# Altium PCB Tigershark 3D R1.3.PcbDoc (part 2 of 3)
Units mil, origin at the board's own origin, x right, y up, seen from the top; angles counter-clockwise.
Board outline 5500 x 4400 mil, 4 copper layers (Top Layer, Groun Plane, Power Plane, Bottom Layer); 256 components, 241 nets, 971 pads, 851 vias.
Unrouted connection lines stored in the file: 58.
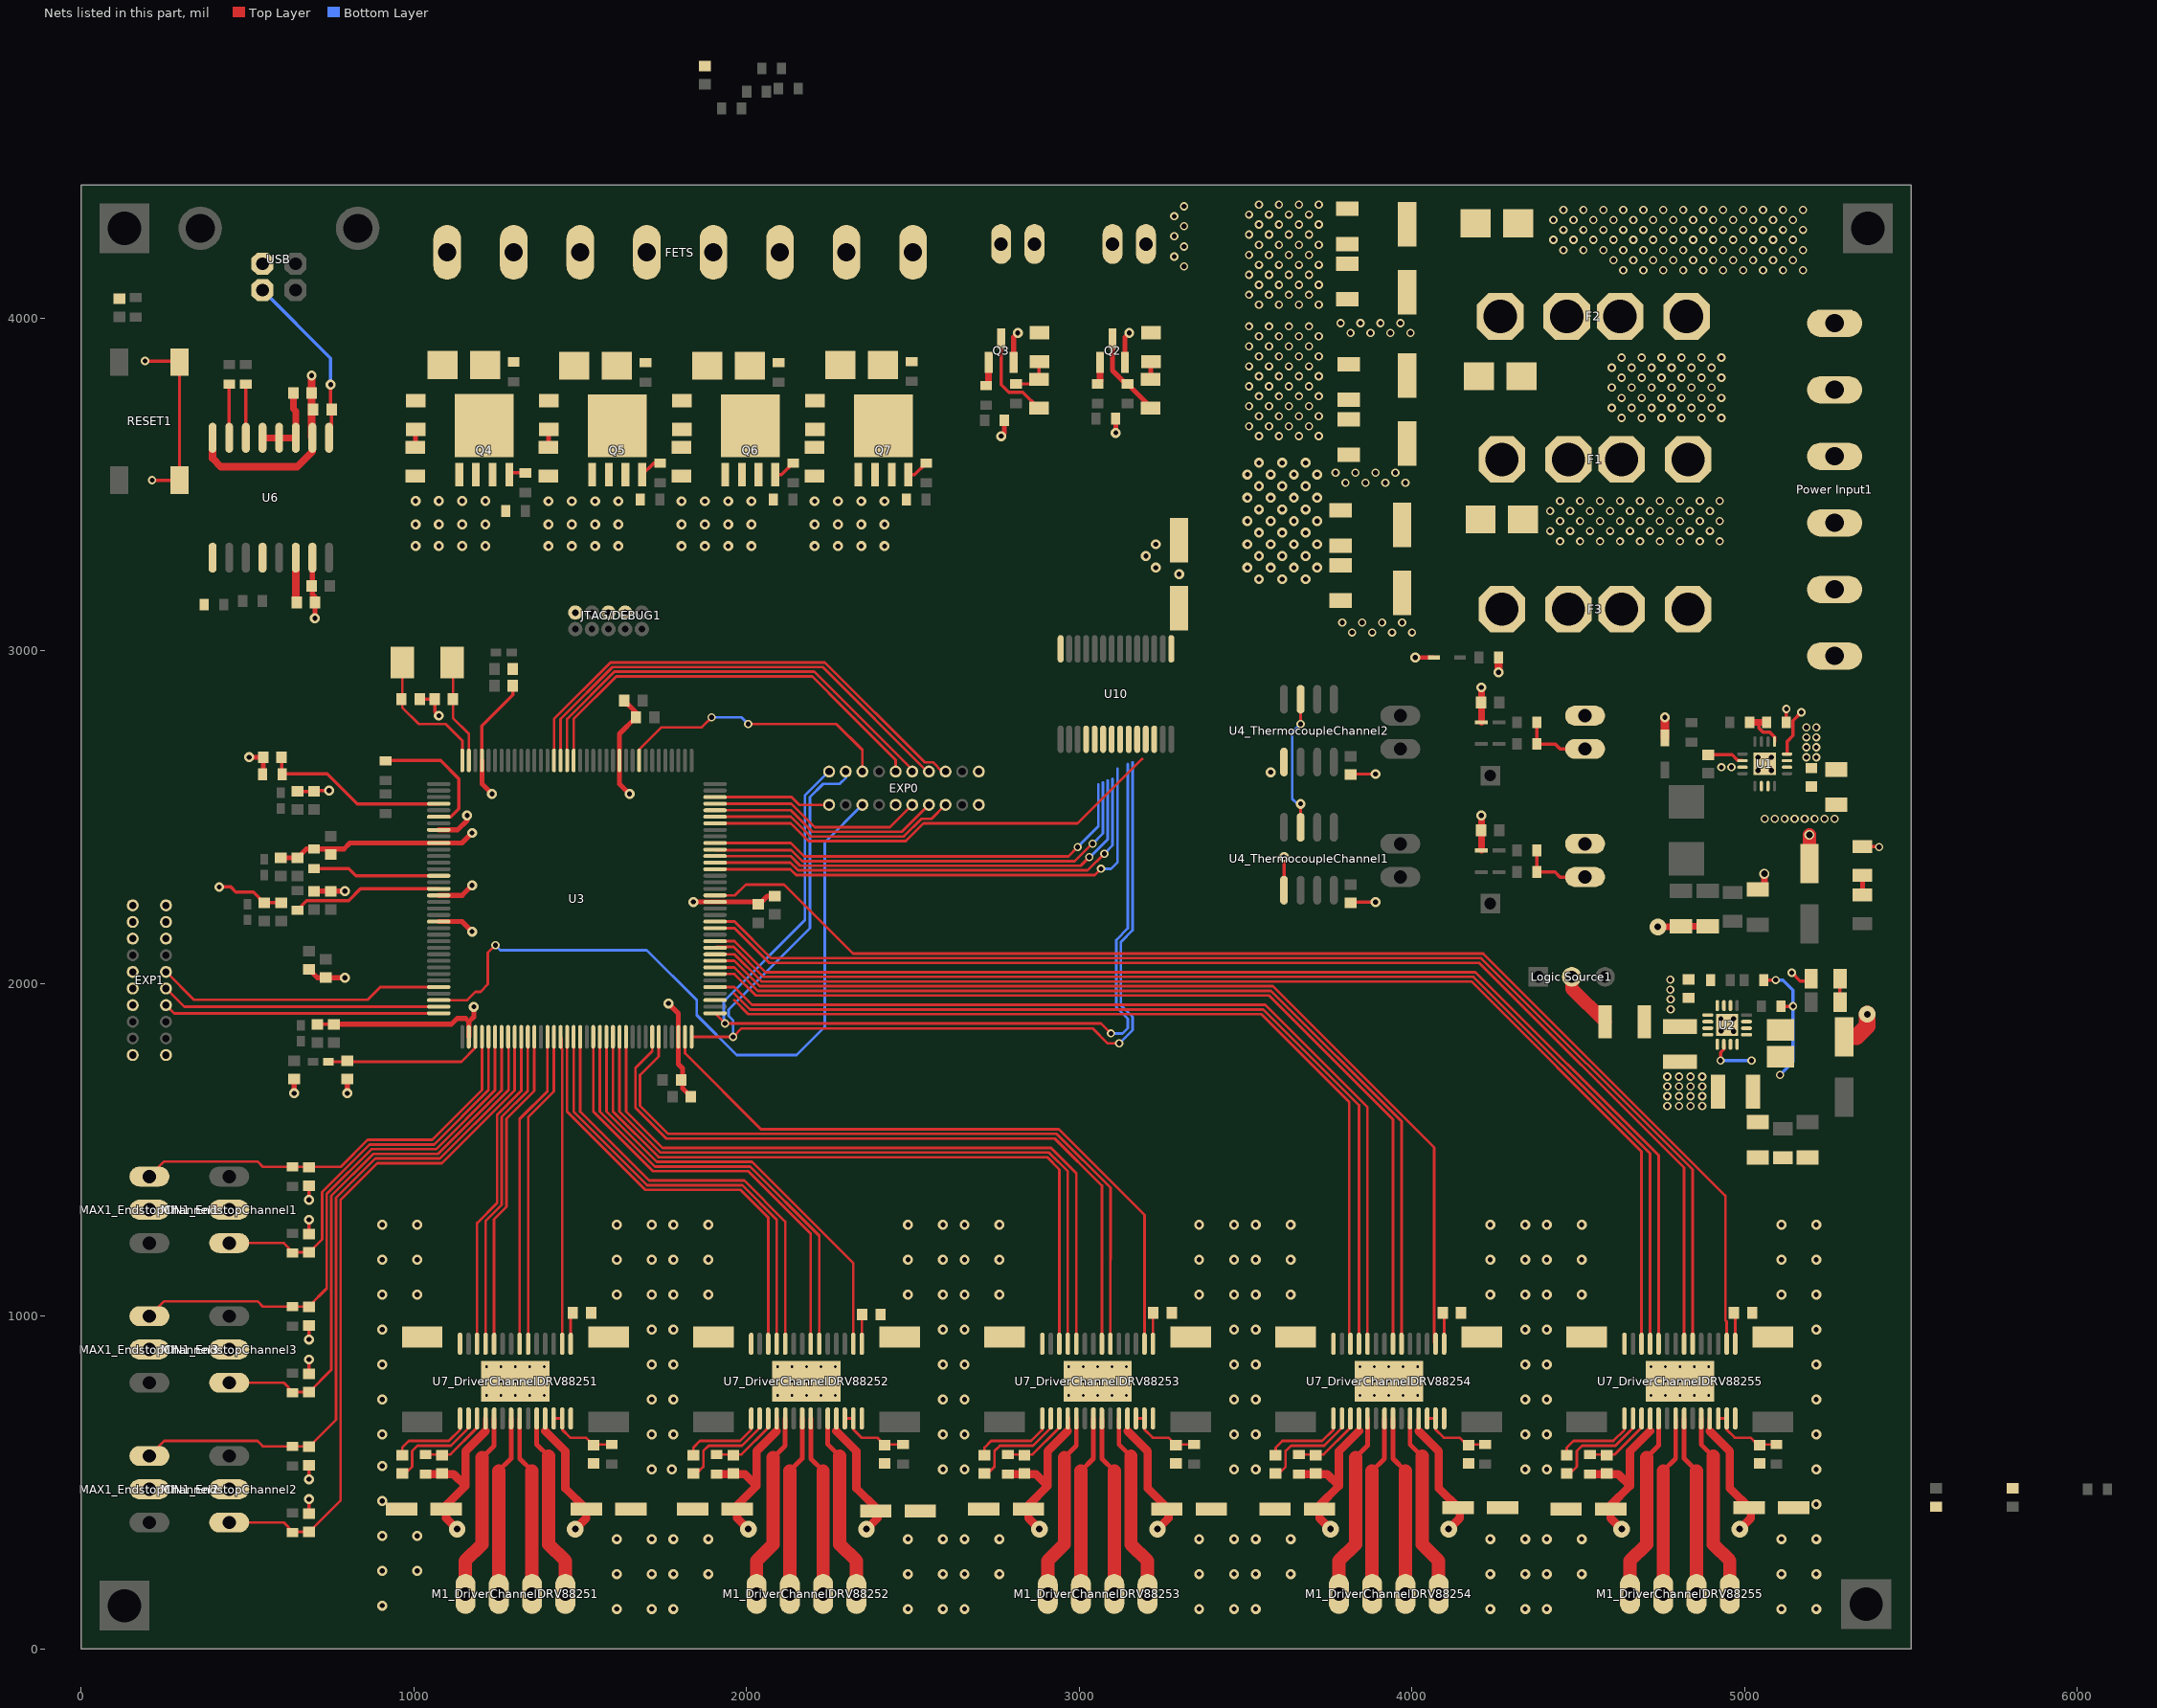
[diagram p4: the nets of this part, all layers, seen from the top]

## Via types
v1: diameter 25, hole 15, Top Layer to Bottom Layer, 397 vias
v2: diameter 30, hole 15, Top Layer to Bottom Layer, 361 vias
v3: diameter 19.68, hole 7.87, Top Layer to Bottom Layer, 75 vias
v4: diameter 50, hole 20, Top Layer to Bottom Layer, 15 vias
v5: diameter 30, hole 20, Top Layer to Bottom Layer, 3 vias

## Nets (pads, with @x,y where several pads share a name; then routed paths per layer and width w, separated by ;. In a path a pad name is that pad's centre, name@x,y a point inside that pad or via, vN(x,y) a via of type N, cw(c..) or ccw(c..) an arc to the next point about the centre after c; other vN are vias at no path point) (continued)
+12VCC1: C10.2 C11.2 C16.1 C18.2 C19.2 C66_DriverChannelDRV88251.1 C66_DriverChannelDRV88252.1 C66_DriverChannelDRV88253.1 C66_DriverChannelDRV88254.1 C66_DriverChannelDRV88255.1 C69_DriverChannelDRV88251.1 C69_DriverChannelDRV88252.1 C69_DriverChannelDRV88253.1 C69_DriverChannelDRV88254.1 C69_DriverChannelDRV88255.1 C70_DriverChannelDRV88251.1 C70_DriverChannelDRV88252.1 C70_DriverChannelDRV88253.1 C70_DriverChannelDRV88254.1 C70_DriverChannelDRV88255.1 D8.2 F3.2 R30_DriverChannelDRV88251.1 R30_DriverChannelDRV88252.1 R30_DriverChannelDRV88253.1 R30_DriverChannelDRV88254.1 R30_DriverChannelDRV88255.1 U1.2 U1.3 U1.11 U7_DriverChannelDRV88251.4 U7_DriverChannelDRV88251.11 U7_DriverChannelDRV88252.4 U7_DriverChannelDRV88252.11 U7_DriverChannelDRV88253.4 U7_DriverChannelDRV88253.11 U7_DriverChannelDRV88254.4 U7_DriverChannelDRV88254.11 U7_DriverChannelDRV88255.4 U7_DriverChannelDRV88255.11 | length 4639.6
  Top Layer w14: 1215.43,654.43 U7_DriverChannelDRV88251.4@1215.43,692.8 ; 1394.57,654.43 U7_DriverChannelDRV88251.11@1394.57,692.8 ; 2090.43,654.43 U7_DriverChannelDRV88252.4@2090.43,692.8 ; 2269.57,654.43 U7_DriverChannelDRV88252.11@2269.57,692.8 ; 2965.43,654.43 U7_DriverChannelDRV88253.4@2965.43,692.8 ; 3144.57,654.43 U7_DriverChannelDRV88253.11@3144.57,692.8 ; 3840.43,654.43 U7_DriverChannelDRV88254.4@3840.43,692.8 ; 4019.57,654.43 U7_DriverChannelDRV88254.11@4019.57,692.8 ; 4715.43,654.43 U7_DriverChannelDRV88255.4@4715.43,692.8 ; 4894.57,654.43 U7_DriverChannelDRV88255.11@4894.57,692.8
  Top Layer w25: R30_DriverChannelDRV88251.1@1035,525.47 1119.53,525.47 1155,490 ; v4(1130,360) 1096.93,393.07 C70_DriverChannelDRV88251.1@1096.93,420 1096.93,431.93 1155,490 ; 1215.43,654.43 1155,594 1155,490 ; 1394.57,654.43 1455,594 1455,483.07 C69_DriverChannelDRV88251.1@1518.07,420 1518.07,393.07 v4(1485,360) ; R30_DriverChannelDRV88252.1@1910,525.47 1994.53,525.47 2030,490 ; v4(2005,360) 1971.93,393.07 C69_DriverChannelDRV88252.1@1971.93,420 1971.93,431.93 2030,490 ; 2090.43,654.43 2030,594 2030,490 ; 2269.57,654.43 2330,594 2330,483.07 2393.07,420 2393.07,393.07 v4(2360,360) ; R30_DriverChannelDRV88253.1@2785,525.47 2869.53,525.47 2905,490 ; v4(2880,360) 2846.93,393.07 C69_DriverChannelDRV88253.1@2846.93,420 2846.93,431.93 2905,490 ; 2965.43,654.43 2905,594 2905,490 ; 3144.57,654.43 3205,594 3205,483.07 3268.07,420 3268.07,393.07 v4(3235,360) ; R30_DriverChannelDRV88254.1@3660,525.47 3744.53,525.47 3780,490 ; v4(3755,360) 3721.93,393.07 C69_DriverChannelDRV88254.1@3721.93,420 3721.93,431.93 3780,490 ; 3840.43,654.43 3780,594 3780,490 ; 4019.57,654.43 4080,594 4080,483.07 4143.07,420 4143.07,393.07 v4(4110,360) ; R30_DriverChannelDRV88255.1@4535,525.47 4619.53,525.47 4655,490 ; v4(4630,360) 4596.93,393.07 C69_DriverChannelDRV88255.1@4596.93,420 4596.93,431.93 4655,490 ; 4715.43,654.43 4655,594 4655,490 ; 4894.57,654.43 4955,594 4955,483.07 5018.07,420 5018.07,393.07 v4(4985,360)
  other v1: 4930,2650 4960,2650.16 5185,2680 5215,2680 5185,2710 5215,2710 5185,2740 5215,2740 5185,2770 5215,2770
  other v2: 3540,3215 3610,3215 3680,3215 3505,3250 3575,3250 3645,3250 3715,3250 3540,3285 3610,3285 3680,3285 3505,3320 3575,3320 3645,3320 3715,3320 3540,3355 3610,3355 3680,3355 3505,3390 3575,3390 3645,3390 3715,3390 3540,3425 3610,3425 3680,3425 3505,3460 3575,3460 3645,3460 3715,3460 3540,3495 3610,3495 3680,3495 3505,3530 3575,3530 3645,3530 3715,3530 3540,3565 3610,3565 3680,3565
+12VCC2: C3.1 C5.2 C6.2 C17.1 D4.2 D15.2 D17.2 D19.2 F2.2 FAN-1.1 FAN-2.1 FETS.3 FETS.5 FETS.7 R1.2 R13.1 R47.1 R60.2 R64.2 R68.2 U10.28 | length 45.2
  Top Layer w8: R1.2@4259.53,2980 R1.2@4260,2979.53
  Top Layer w25: v2(4260,2935) R1.2@4260,2979.53
  other v1: 3540,4040 3600,4040 3660,4040 3720,4040 3510,4070 3570,4070 3630,4070 3690,4070 3540,4100 3600,4100 3660,4100 3720,4100 3510,4130 3570,4130 3630,4130 3690,4130 3315,4155 3540,4160 3600,4160 3660,4160 3720,4160 3285,4185 3510,4190 3570,4190 3630,4190 3690,4190 3315,4215 3540,4220 3600,4220 3660,4220 3720,4220 3285,4246 3510,4251 3570,4251 3630,4251 3690,4251 3315,4276 3540,4281 3600,4281 3660,4281 3720,4281 3285,4306 3510,4311 3570,4311 3630,4311 3690,4311 3315,4336 3540,4341 3600,4341 3660,4341 3720,4341
+12VCC3: C12.1 C14.2 C15.2 D6.2 D12.2 F1.2 FETS.1 R56.2
  other v1: 3540,3645 3600,3645 3660,3645 3720,3645 3510,3675 3570,3675 3630,3675 3690,3675 3540,3705 3600,3705 3660,3705 3720,3705 3510,3735 3570,3735 3630,3735 3690,3735 3540,3765 3600,3765 3660,3765 3720,3765 3510,3795 3570,3795 3630,3795 3690,3795 3540,3825 3600,3825 3660,3825 3720,3825 3510,3855 3570,3855 3630,3855 3690,3855 3540,3885 3600,3885 3660,3885 3720,3885 3510,3915 3570,3915 3630,3915 3690,3915 3540,3945 3600,3945 3660,3945 3720,3945 3510,3975 3570,3975 3630,3975 3690,3975
AVREF: C65.2 FB9.2 U3.75 | length 491.1
  Top Layer w8: FB9.2@743.62,1765 1142.57,1765 1184.88,1807.31 U3.75@1184.88,1839.65
BED_PWM: U10.9
BST: C7.2 U1.10 | length 110.4
  Top Layer w10: C7.2@4890,2687.56 4961.7,2687.56 4979.41,2669.84 U1.10@4993.07,2669.84
CS_FET: U3.111 U10.10
DIR1: U3.87 U7_DriverChannelDRV88251.20 | length 954.6
  Top Layer w8: U7_DriverChannelDRV88251.20@1343.39,917.2 1343.39,1598.39 1421,1676 1421,1839.54 U3.87@1421.1,1839.65
DIR2: U3.94 U7_DriverChannelDRV88252.20 | length 1363.3
  Top Layer w8: U3.94@1558.9,1839.65 1558.9,1615.1 1723.99,1450 2010.2,1450 2218.39,1241.82 U7_DriverChannelDRV88252.20@2218.39,917.2
DIR3: U3.103 U7_DriverChannelDRV88253.20 | length 2215.6
  Top Layer w8: U3.103@1736.06,1839.65 1736.06,1781.06 1680,1725 1680,1632.59 1764.59,1548 2932.2,1548 3094,1386.2 3094,1169.01 3093.39,1168.4 U7_DriverChannelDRV88253.20@3093.39,917.2
DIR4: U3.116 U7_DriverChannelDRV88254.20 | length 2923.1
  Top Layer w8: U3.116@1905.35,2048.31 1963.1,2048.31 2033.41,1978 3575.99,1978 3968.39,1585.61 U7_DriverChannelDRV88254.20@3968.39,917.2
DIR5: U3.123 U7_DriverChannelDRV88255.20 | length 3770.2
  Top Layer w8: U3.123@1905.35,2186.1 1963.9,2186.1 2074,2076 4207.99,2076 4843.39,1440.61 U7_DriverChannelDRV88255.20@4843.39,917.2
DIR_EXP1: EXP1.6
DIR_EXP2: EXP1.15 U3.71 | length 842.3
  Top Layer w8: EXP1.15@255,1985 309.8,1930.2 U3.71@1074.65,1930.2
DM_N: R18.1 U6.6 | length 161.4
  Top Layer w10: U6.6@495,3640.12 R18.1@495,3801.47
DP_P: R20.1 U6.7 | length 161.4
  Top Layer w10: U6.7@445,3640.12 R20.1@445,3801.47
DRV_RESET1: U3.88 U7_DriverChannelDRV88251.16 | length 924.5
  Top Layer w8: U3.88@1440.79,1839.65 1444.57,1835.87 1444.57,1803.53 1445.75,1802.35 U7_DriverChannelDRV88251.16@1445.75,917.2
DRV_RESET2: U3.95 U7_DriverChannelDRV88252.16 | length 1397.5
  Top Layer w8: U3.95@1578.58,1839.65 1578.58,1615.21 1729.79,1464 2016,1464 2320.75,1159.25 U7_DriverChannelDRV88252.16@2320.75,917.2
DRV_RESET3: U3.107 U7_DriverChannelDRV88253.16 | length 2018.7
  Top Layer w8: U3.107@1814.8,1839.65 1814.8,1790.2 2043,1562 2938,1562 3195.75,1304.25 U7_DriverChannelDRV88253.16@3195.75,917.2
DRV_RESET4: U3.117 U7_DriverChannelDRV88254.16 | length 2985.2
  Top Layer w8: U3.117@1905.35,2067.99 1963.21,2067.99 2039.21,1992 3581.79,1992 4066.69,1507.1 4066.69,921.26 U7_DriverChannelDRV88254.16@4070.75,917.2
DRV_RESET5: U3.127 U7_DriverChannelDRV88255.16 | length 3883.7
  Top Layer w8: U3.127@1905.35,2264.84 1964.84,2264.84 1997.23,2297.23 2112.72,2297.23 2319.95,2090 4213.79,2090 4941.69,1362.1 4941.69,988.14 4945.75,984.09 U7_DriverChannelDRV88255.16@4945.75,917.2
DRV_RESET_EXP1: EXP1.7
DRV_RESET_EXP2: EXP1.14 U3.72 | length 829.8
  Top Layer w8: EXP1.14@255,1935 279.49,1910.51 U3.72@1074.65,1910.51
EN1: U3.86 U7_DriverChannelDRV88251.21 | length 957.1
  Top Layer w8: U7_DriverChannelDRV88251.21@1317.8,917.2 1317.8,1592.8 1401.42,1676.42 U3.86@1401.42,1839.65
EN2: U3.93 U7_DriverChannelDRV88252.21 | length 1360.8
  Top Layer w8: U3.93@1539.21,1839.65 1539.21,1614.98 1718.2,1436 2004.4,1436 2192.8,1247.61 U7_DriverChannelDRV88252.21@2192.8,917.2
EN3: U3.102 U7_DriverChannelDRV88253.21 | length 2207.9
  Top Layer w8: U3.102@1716.38,1839.65 1716.38,1796.38 1666,1746 1666,1626.79 1758.79,1534 2926.4,1534 3067.8,1392.61 U7_DriverChannelDRV88253.21@3067.8,917.2
EN4: U3.115 U7_DriverChannelDRV88254.21 | length 2892.7
  Top Layer w8: U3.115@1905.35,2028.62 1962.99,2028.62 2027.61,1964 3570.2,1964 3942.8,1591.4 U7_DriverChannelDRV88254.21@3942.8,917.2
EN5: U3.122 U7_DriverChannelDRV88255.21 | length 3739.9
  Top Layer w8: U3.122@1905.35,2166.42 1963.78,2166.42 2068.2,2062 4202.2,2062 4817.8,1446.4 U7_DriverChannelDRV88255.21@4817.8,917.2
EN_EXP1: EXP1.5
EN_EXP2: EXP1.16 U3.68 | length 870.3
  Top Layer w8: EXP1.16@255,2035 339,1951 860.8,1951 899.05,1989.25 U3.68@1074.65,1989.25
EXP_CS: EXP0.1 U3.142 | length 352.2
  Top Layer w8: U3.142@1905.35,2560.12 2134.88,2560.12 2158,2537 EXP0.1@2248,2537
EXP_INTERRUP1: EXP0.16 U3.19 | length 1284.4
  Top Layer w8: U3.19@1480.16,2670.35 1480.16,2794.76 1608.4,2923 2197.2,2923 2248,2872.2 2248,2872 2448,2672 EXP0.16@2448,2637
EXP_INTERRUP2: EXP0.15 U3.20 | length 1348.1
  Top Layer w8: U3.20@1460.47,2670.35 1460.47,2794.87 1602.6,2937 2203,2937 2498,2642 EXP0.15@2498,2637
EXP_SYNC: EXP0.6 U3.141 | length 649.6
  Top Layer w8: U3.141@1905.35,2540.43 2134.57,2540.43 2205,2470 2431,2470 EXP0.6@2498,2537
FB: R7.1 R10.2 U1.5 | length 134.9
  Top Layer w10: 5042.26,2785 5042.26,2767.74 5055,2755 5075.11,2755 5089.53,2740.59 U1.5@5089.53,2726.93
  Top Layer w20: R7.1@5019.53,2785 R10.2@5065,2785
FET_PWM1: U3.131 U10.4 | length 1513.1
  Top Layer w8: U3.131@1905.35,2343.58 2131.64,2343.58 2149.22,2326 3046,2326 v1(3065,2345)
  Bottom Layer w8: v1(3065,2345) 3095,2345 3115,2365 3115,2645
FET_PWM2: U3.132 U10.5 | length 1435.4
  Top Layer w8: U3.132@1905.35,2363.27 2033.27,2363.27 2033.31,2363.31 2131.71,2363.31 2155.02,2340 3025,2340 v1(3075,2390)
  Bottom Layer w8: v1(3075,2390) 3100,2415 3100,2615
FET_PWM3: U3.133 U10.6 | length 1401.3
  Top Layer w8: U3.133@1905.35,2382.95 2132.05,2382.95 2161,2354 3004,2354 v1(3030,2380)
  Bottom Layer w8: v1(3030,2380) 3031.82,2380 3085,2433.18 3085,2610
FET_PWM4: U3.134 U10.7 | length 1367.6
  Top Layer w8: U3.134@1905.35,2402.64 1906.99,2401 2134.2,2401 2167.2,2368 2986.18,2368 3038.18,2420 v1(3040,2420)
  Bottom Layer w8: v1(3040,2420) 3071,2451 3071,2604.2
FET_PWM5: U3.135 U10.8 | length 1332
  Top Layer w8: U3.135@1905.35,2422.32 2132.68,2422.32 2173,2382 2967,2382 v1(2995,2410)
  Bottom Layer w8: v1(2995,2410) 3057,2472 3057,2598.4
FET_RESET: U3.138 | length 1407.6
  Top Layer w8: U3.138@1905.35,2481.38 2133.02,2481.38 2186.4,2428 2478.6,2428 2531.6,2481 2994.58,2481 3188.58,2675
GND: "Power Input1.2" "Power Input1.4" "Power Input1.6" C1_EndstopChannel1.2 C1_EndstopChannel2.2 C1_EndstopChannel3.2 C2_EndstopChannel1.2 C2_EndstopChannel2.2 C2_EndstopChannel3.2 C3.2 C4.2 C5.1 C6.1 C8.1 C9.2 C10.1 C11.1 C12.2 C13.1 C14.1 C15.1 C16.2 C17.2 C18.1 C19.1 C22.2 C23.2 C24.1 C25.1 C26.2 C27.1 C28.1 C29.2 C30_ThermistorChannel1.1 C30_ThermistorChannel2.1 C31_ThermocoupleChannel1.1 C31_ThermocoupleChannel2.1 C32.1 C33.1 C34.2 C35.2 C36.1 C37.1 C38.1 C39.1 C40.1 C41.1 C42.1 C43.1 C44.1 C45.1 C46.1 C47.1 C48.1 C52.2 C53.1 C54.1 C55.1 C56.1 C57.1 C60.1 C61.1 C62.1 C63.1 C64.1 C65.1 C69_DriverChannelDRV88251.2 C69_DriverChannelDRV88252.2 C69_DriverChannelDRV88253.2 C69_DriverChannelDRV88254.2 C69_DriverChannelDRV88255.2 C70_DriverChannelDRV88251.2 C70_DriverChannelDRV88252.2 C70_DriverChannelDRV88253.2 C70_DriverChannelDRV88254.2 C70_DriverChannelDRV88255.2 C71_DriverChannelDRV88251.1 C71_DriverChannelDRV88252.1 C71_DriverChannelDRV88253.1 C71_DriverChannelDRV88254.1 C71_DriverChannelDRV88255.1 C73.1 C75_DriverChannelDRV88251.1 C75_DriverChannelDRV88252.1 C75_DriverChannelDRV88253.1 C75_DriverChannelDRV88254.1 C75_DriverChannelDRV88255.1 D1.1 D4.1 D5.1 D6.1 D7.1 D8.1 D9.1 D12_ThermistorChannel1.1 D12_ThermistorChannel2.1 EXP0.10 EXP0.11 EXP1.10 EXP1.11 JTAG/DEBUG1.3 JTAG/DEBUG1.5 JTAG/DEBUG1.9 MAX1_EndstopChannel1.2 MAX1_EndstopChannel2.2 MAX1_EndstopChannel3.2 MIN1_EndstopChannel1.2 MIN1_EndstopChannel2.2 MIN1_EndstopChannel3.2 P2_ThermistorChannel1.2 P2_ThermistorChannel2.2 Q2.2 Q3.2 Q4.1 Q4.2 Q4.3 Q5.1 Q5.2 Q5.3 Q6.1 Q6.2 Q6.3 Q7.1 Q7.2 Q7.3 R4.2 R10.1 R15.2 R23.1 R32_DriverChannelDRV88251.1 R32_DriverChannelDRV88252.1 R32_DriverChannelDRV88253.1 R32_DriverChannelDRV88254.1 R32_DriverChannelDRV88255.1 R33_DriverChannelDRV88251.1 R33_DriverChannelDRV88252.1 R33_DriverChannelDRV88253.1 R33_DriverChannelDRV88254.1 R33_DriverChannelDRV88255.1 R38.1 R46.2 R55.2 R59.2 R63.2 R67.2 R71.2 RESET1.2 U1.4 U1.14 U1.15 U1.17 U2.6 U2.7 U2.8 U2.15 U2.16 U2.17 U3.12 U3.33 U3.44 U3.46 U3.54 U3.58 U3.74 U3.106 U3.126 U4_ThermocoupleChannel1.1 U4_ThermocoupleChannel2.1 U6.9 U6.15 U7_DriverChannelDRV88251.14 U7_DriverChannelDRV88251.28 U7_DriverChannelDRV88251.29 U7_DriverChannelDRV88252.14 U7_DriverChannelDRV88252.28 U7_DriverChannelDRV88252.29 U7_DriverChannelDRV88253.14 U7_DriverChannelDRV88253.28 U7_DriverChannelDRV88253.29 U7_DriverChannelDRV88254.14 U7_DriverChannelDRV88254.28 U7_DriverChannelDRV88254.29 U7_DriverChannelDRV88255.14 U7_DriverChannelDRV88255.28 U7_DriverChannelDRV88255.29 U10.15 | length 6032.6
  Top Layer w10: v1(192,3871) 291.72,3871 RESET1.2@295.55,3867.17 RESET1.2@295.55,3512.83 v1(213.17,3512.83) ; v2(415,2290) 450,2290 465,2275 517.56,2275 C55.1@550,2242.56 C54.1@601.22,2242.56 ; C61.1@650,2577.56 C60.1@700,2577.56 702.44,2580 v2(745,2580) ; C1_EndstopChannel2.2@685,407.09 v2(685,450) ; v2(685,510) C2_EndstopChannel2.2@685,552.44 ; C1_EndstopChannel3.2@685,827.09 v2(685,870) ; v2(685,930) C2_EndstopChannel3.2@685,972.44 ; C1_EndstopChannel1.2@685,1247.09 v2(685,1290) ; v2(685,1350) C2_EndstopChannel1.2@685,1392.44 ; C27.1@710,1877.56 C13.1@760,1877.56 ; C43.1@1017.56,2855 C44.1@1062.44,2855 1062.44,2817.56 v2(1075,2805) ; U3.33@1204.57,2670.35 1204.57,2774.57 1297.56,2867.56 C33.1@1297.56,2895 ; U4_ThermocoupleChannel1.1@3615,2280.51 v2(3615,2380) ; C31_ThermocoupleChannel1.1@3832.56,2244.49 v2(3890,2244.49) ; C31_ThermocoupleChannel2.1@3832.56,2629.49 v2(3890,2629.49) ; R10.1@5125,2785.47 v1(5125,2825) ; U1.4@5126.93,2689.53 5126.93,2726.93 5145,2745 5145,2790 v1(5170,2815) ; v1(5141.45,2032.45) 5166.45,2007.45 5193.3,2007.45 D9.1@5199.79,2013.94 ; D7.1@5354,2411.62 v1@5402.38,2411.62
  Top Layer w12: v2(4009.53,2980) D1.1@4065.63,2980
  Top Layer w15: v2(505,2680) C73.1@547.44,2680 R23.1@547.44,2630.75 ; C28.1@600,2377.56 C53.1@650,2377.56 676.97,2404.53 R4.2@700,2404.53 789.53,2404.53 807.32,2422.32 U3.46@1074.65,2422.32 1144.84,2422.32 v2(1175,2452.48) ; v2(640,1670) C64.1@640,1712.44 ; C42.1@685,2042.44 710,2017.44 C48.1@735,2017.44 v2(792.56,2017.44) ; U6.15@695,3279.88 695,3170 702.56,3162.44 C56.1@702.56,3145 v2(702.56,3097.56) ; C37.1@700,2277.56 C36.1@750,2277.56 v2(792.44,2277.56) ; C13.1@760,1877.56 1112.56,1877.56 1130,1895 1155,1895 1165.2,1884.8 ; v2(800,1670) C65.1@800,1712.44 ; U3.58@1074.65,2186.1 1144.84,2186.1 v2(1175,2155.94) ; U3.54@1074.65,2264.84 1144.84,2264.84 v2(1175,2295) ; U3.44@1074.65,2461.69 1131.69,2461.69 1160,2490 v2(1160,2505) ; U3.74@1165.2,1839.65 1165.2,1884.8 ; v2(1180,1930) 1180,1899.61 1165.2,1884.8 ; U3.33@1204.57,2670.35 1204.57,2600.16 v2(1234.72,2570) ; C47.1@1632.44,2850 1667.44,2815 C38.1@1667.44,2800 1617.95,2750.51 U3.12@1617.95,2670.35 1617.95,2600.16 v2(1648.11,2570) ; v2(1764.96,1940) 1795.12,1909.84 U3.106@1795.12,1839.65 1795.12,1757.95 1808.07,1745 1808.07,1684.92 C45.1@1832.99,1660 ; v2@1835.16,2245.16 U3.126@1905.35,2245.16 2045.16,2245.16 2062.56,2262.56 C46.1@2085,2262.56 ; v2(2765,3645) 2774.53,3654.53 R55.2@2774.53,3692.58 ; Q3.2@2802.4,3867.14 2802.4,3942.4 v2(2815,3955) ; v2(3109.53,3655) R46.2@3109.53,3697.58 ; Q2.2@3137.4,3867.14 3137.4,3942.4 v2(3150,3955)
  Top Layer w20: D12_ThermistorChannel1.1@4208.43,2400 v2(4208.43,2505) ; D12_ThermistorChannel2.1@4208.43,2785 v2(4208.43,2890) ; v4(4739,2170) C8.1@4806.15,2170 ; C8.1@4808,2171.85 C29.2@4889,2171.85 ; C34.2@5059,2283.15 v5(5059,2330)
  Top Layer w25: D5.1@4760,2738.23 v2(4760,2800)
  Top Layer w40: C9.2@5194,2400 v5(5194,2446.85)
  Top Layer w50: C23.2@5299,1840 5335.82,1840 5368.27,1872.45 v4(5368.27,1907.45)
  other v1: 4767.18,1631.45 4802.18,1631.45 4837.18,1631.45 4872.18,1631.45 4767.18,1661.45 4802.18,1661.45 4837.18,1661.45 4872.18,1661.45 4767.18,1690.45 4802.18,1690.45 4837.18,1690.45 4872.18,1690.45 4767.18,1720.45 4802.18,1720.45 4837.18,1720.45 4872.18,1720.45 4966.18,1856.45 4929.18,1857.45 4928.18,1894.45 4966.18,1894.45 4777.18,1922.45 4777.18,1952.45 4776.18,1981.45 4776.18,2011.45 5403.99,2410 5060,2495 5090,2495 5120,2495 5150,2495 5180,2495 5210,2495 5240,2495 5270,2495 5040,2640 5080,2640 5040,2680 5080,2680 3820,3055 3880,3055 3940,3055 4000,3055 3790,3085 3850,3085 3910,3085 3970,3085 4445,3329 4505,3329 4565,3329 4625,3329 4685,3329 4745,3329 4805,3329 4865,3329 4925,3329 4415,3360 4475,3360 4535,3360 4595,3360 4655,3360 4715,3360 4775,3360 4835,3360 4895,3360 4445,3390 4505,3390 4565,3390 4625,3390 4685,3390 4745,3390 4805,3390 4865,3390 4925,3390 4415,3420 4475,3420 4535,3420 4595,3420 4655,3420 4715,3420 4775,3420 4835,3420 4895,3420 4445,3450 4505,3450 4565,3450 4625,3450 4685,3450 4745,3450 4805,3450 4865,3450 4925,3450 3800,3505 3860,3505 3920,3505 3980,3505 3770,3535 3830,3535 3890,3535 3950,3535 4630,3700 4690,3700 4750,3700 4810,3700 4870,3700 4930,3700 4600,3730 4660,3730 4720,3730 4780,3730 4840,3730 4900,3730 4630,3760 4690,3760 4750,3760 4810,3760 4870,3760 4930,3760 4600,3791 4660,3791 4720,3791 4780,3791 4840,3791 4900,3791 4630,3821 4690,3821 4750,3821 4810,3821 4870,3821 4930,3821 4600,3851 4660,3851 4720,3851 4780,3851 4840,3851 4900,3851 4630,3881 4690,3881 4750,3881 4810,3881 4870,3881 4930,3881 3815,3955 3875,3955 3935,3955 3995,3955 3785,3985 3845,3985 3905,3985 3965,3985 4635,4144 4695,4144 4755,4144 4815,4144 4875,4144 4935,4144 4995,4144 5055,4144 5115,4144 5175,4144 4605,4174 4665,4174 4725,4174 4785,4174 4845,4174 4905,4174 4965,4174 5025,4174 5085,4174 5145,4174 4455,4204 4515,4204 4575,4204 4635,4204 4695,4204 4755,4204 4815,4204 4875,4204 4935,4204 4995,4204 5055,4204 5115,4204 5175,4204 4425,4235 4485,4235 4545,4235 4605,4235 4665,4235 4725,4235 4785,4235 4845,4235 4905,4235 4965,4235 5025,4235 5085,4235 5145,4235 4455,4265 4515,4265 4575,4265 4635,4265 4695,4265 4755,4265 4815,4265 4875,4265 4935,4265 4995,4265 5055,4265 5115,4265 5175,4265 4425,4295 4485,4295 4545,4295 4605,4295 4665,4295 4725,4295 4785,4295 4845,4295 4905,4295 4965,4295 5025,4295 5085,4295 5145,4295 4455,4325 4515,4325 4575,4325 4635,4325 4695,4325 4755,4325 4815,4325 4875,4325 4935,4325 4995,4325 5055,4325 5115,4325 5175,4325
  other v2: 1610,120 1715,120 1780,120 2485,120 2590,120 2655,120 3360,120 3465,120 3530,120 4235,120 4340,120 4405,120 5110,120 5215,120 905,130 1610,225 1715,225 1780,225 1885,225 2485,225 2590,225 2655,225 2760,225 3360,225 3465,225 3530,225 3635,225 4235,225 4340,225 4405,225 4510,225 5110,225 5215,225 905,235 1010,235 1610,330 1715,330 1780,330 1885,330 2485,330 2590,330 2655,330 2760,330 3360,330 3465,330 3530,330 3635,330 4235,330 4340,330 4405,330 4510,330 5110,330 5215,330 905,340 1010,340 5215,435 905,445 1715,540 1775,540 2590,540 2655,540 3465,540 3530,540 4340,540 4405,540 5215,540 905,550 905,645 1715,645 1780,645 2590,645 2655,645 3465,645 3530,645 4340,645 4405,645 5215,645 905,750 1715,750 1780,750 2590,750 2655,750 3465,750 3530,750 4340,750 4405,750 5215,750 905,855 1715,855 1780,855 2590,855 2655,855 3465,855 3530,855 4340,855 4405,855 5215,855 905,960 1715,960 1780,960 2590,960 2655,960 3465,960 3530,960 4340,960 4405,960 5215,960 905,1065 1010,1065 1610,1065 1715,1065 1780,1065 1885,1065 2485,1065 2590,1065 2655,1065 2760,1065 3360,1065 3465,1065 3530,1065 3635,1065 4235,1065 4340,1065 4405,1065 4510,1065 5110,1065 5215,1065 905,1170 1010,1170 1610,1170 1715,1170 1780,1170 1885,1170 2485,1170 2590,1170 2655,1170 2760,1170 3360,1170 3465,1170 3530,1170 3635,1170 4235,1170 4340,1170 4405,1170 4510,1170 5110,1170 5215,1170 905,1275 1010,1275 1610,1275 1715,1275 1780,1275 1885,1275 2485,1275 2590,1275 2655,1275 2760,1275 3360,1275 3465,1275 3530,1275 3635,1275 4235,1275 4340,1275 4405,1275 4510,1275 5110,1275 5215,1275 1840,2245 3575,2635 3300,3230 3230,3250 3200,3285 1005,3315 1075,3315 1145,3315 1215,3315 1404.5,3314.61 1474.5,3314.61 1544.5,3314.61 1614.5,3314.61 1804.5,3314.61 1874.5,3314.61 1944.5,3314.61 2014.5,3314.61 2204.5,3314.61 2274.5,3314.61 2344.5,3314.61 2414.5,3314.61 3230,3320 1005,3380 1075,3380 1145,3380 1215,3380 1404.5,3379.61 1474.5,3379.61 1544.5,3379.61 1614.5,3379.61 1804.5,3379.61 1874.5,3379.61 1944.5,3379.61 2014.5,3379.61 2204.5,3379.61 2274.5,3379.61 2344.5,3379.61 2414.5,3379.61 1005,3450 1075,3450 1145,3450 1215,3450 1404.5,3449.61 1474.5,3449.61 1544.5,3449.61 1614.5,3449.61 1804.5,3449.61 1874.5,3449.61 1944.5,3449.61 2014.5,3449.61 2204.5,3449.61 2274.5,3449.61 2344.5,3449.61 2414.5,3449.61
  other v3: 1218.39,761.69 1261.69,761.69 1305,761.69 1348.31,761.69 1391.61,761.69 2093.39,761.69 2136.69,761.69 2180,761.69 2223.31,761.69 2266.61,761.69 2968.39,761.69 3011.69,761.69 3055,761.69 3098.31,761.69 3141.61,761.69 3843.39,761.69 3886.69,761.69 3930,761.69 3973.31,761.69 4016.61,761.69 4718.39,761.69 4761.69,761.69 4805,761.69 4848.31,761.69 4891.61,761.69 1218.39,805 1261.69,805 1305,805 1348.31,805 1391.61,805 2093.39,805 2136.69,805 2180,805 2223.31,805 2266.61,805 2968.39,805 3011.69,805 3055,805 3098.31,805 3141.61,805 3843.39,805 3886.69,805 3930,805 3973.31,805 4016.61,805 4718.39,805 4761.69,805 4805,805 4848.31,805 4891.61,805 1218.39,848.31 1261.69,848.31 1305,848.31 1348.31,848.31 1391.61,848.31 2093.39,848.31 2136.69,848.31 2180,848.31 2223.31,848.31 2266.61,848.31 2968.39,848.31 3011.69,848.31 3055,848.31 3098.31,848.31 3141.61,848.31 3843.39,848.31 3886.69,848.31 3930,848.31 3973.31,848.31 4016.61,848.31 4718.39,848.31 4761.69,848.31 4805,848.31 4848.31,848.31 4891.61,848.31
GPIO0_EXP: EXP0.7 U3.140 | length 703
  Top Layer w8: U3.140@1905.35,2520.75 2133.25,2520.75 2197.99,2456 2467,2456 EXP0.7@2548,2537
GPIO1_EXP: EXP0.8 U3.139 | length 756.5
  Top Layer w8: U3.139@1905.35,2501.06 2133.13,2501.06 2192.2,2442 2472.8,2442 2525.8,2495 2556,2495 EXP0.8@2598,2537
GPIO2_EXP: EXP0.14 U3.21 | length 1426.5
  Top Layer w8: U3.21@1440.79,2670.35 1440.79,2794.98 1596.8,2951 2229,2951 2543,2637 EXP0.14@2548,2637
GPIO3_EXP: EXP0.13 U3.22 | length 1507.9
  Top Layer w8: U3.22@1421.1,2670.35 1421.1,2795.1 1591.01,2965 2234.8,2965 2534.8,2665 2559.6,2665 2587.6,2637 EXP0.13@2598,2637
I2C_SCL: EXP0.3 U3.70 | length 2196.5
  Top Layer w8: U3.70@1074.65,1949.88 1159.88,1949.88 1185,1975 1200,1975 1222.5,1997.5 1222.5,2092.5 v1(1245,2115)
  Bottom Layer w8: v1(1245,2115) 1260,2100 1700,2100 1850,1950 1850,1905 1970,1785 2150,1785 2235,1870 2235,2424 EXP0.3@2348,2537
I2C_SDA: EXP0.18 U3.9 | length 849.2
  Top Layer w8: U3.9@1677.01,2670.35 1677.01,2702.69 1744.32,2770 1865,2770 v1(1895,2800) ; v1(2005,2780) 2270,2780 2348,2702 EXP0.18@2348,2637
  Bottom Layer w8: v1(1895,2800) 1985,2800 v1(2005,2780)
INPUT_GND: C58.1 C59.1 U6.2 U6.8 USB.4 | length 617.5
  Top Layer w22: U6.8@395,3640.12 395,3578 420,3553 649,3553 695,3599 U6.2@695,3640.12 ; U6.2@692.56,3642.56 C59.1@692.56,3775 v2(692.56,3827.44)
KRESET: EXP0.5
MAX_ES1: C2_EndstopChannel1.1 MAX1_EndstopChannel1.1 R3_EndstopChannel1.2 U3.76 | length 1280.4
  Top Layer w8: MAX1_EndstopChannel1.1@205,1420 250,1465 530,1465 545.94,1449.06 R3_EndstopChannel1.2@635,1449.06 780.06,1449.06 861.01,1530 1055,1530 1204.57,1679.57 U3.76@1204.57,1839.65
MAX_ES2: C2_EndstopChannel2.1 MAX1_EndstopChannel2.1 R3_EndstopChannel2.2 U3.80 | length 2100.8
  Top Layer w8: MAX1_EndstopChannel2.1@205,580 250,625 530,625 545.94,609.06 R3_EndstopChannel2.2@635,609.06 683.5,609.06 C2_EndstopChannel2.1@685,607.56 766,688.56 766,1355.8 884.2,1474 1078.2,1474 1285,1680.8 1285,1837.95 U3.80@1283.31,1839.65
MAX_ES3: C2_EndstopChannel3.1 MAX1_EndstopChannel3.1 R3_EndstopChannel3.2 U3.78 | length 1663.1
  Top Layer w8: MAX1_EndstopChannel3.1@205,1000 250,1045 530,1045 545.94,1029.06 R3_EndstopChannel3.2@635,1029.06 683.5,1029.06 C2_EndstopChannel3.1@685,1027.56 685,1030.55 738,1083.55 738,1367.4 872.6,1502 1066.6,1502 1243.94,1679.34 U3.78@1243.94,1839.65
MIN_ES1: C1_EndstopChannel1.1 MIN1_EndstopChannel1.1 R2_EndstopChannel1.2 U3.77 | length 1236.3
  Top Layer w8: MIN1_EndstopChannel1.1@445,1220 608.94,1220 636.97,1191.97 C1_EndstopChannel1.1@685,1191.97 724,1230.97 724,1373.2 866.8,1516 1060.8,1516 1224.25,1679.45 U3.77@1224.25,1839.65
MIN_ES2: C1_EndstopChannel2.1 MIN1_EndstopChannel2.1 R2_EndstopChannel2.2 U3.81 | length 2108.9
  Top Layer w8: MIN1_EndstopChannel2.1@445,380 608.94,380 636.97,351.97 C1_EndstopChannel2.1@685,351.97 780,446.97 780,1350 890,1460 1083.99,1460 1302.99,1679 U3.81@1302.99,1839.65
MIN_ES3: C1_EndstopChannel3.1 MIN1_EndstopChannel3.1 R2_EndstopChannel3.2 U3.79 | length 1672.6
  Top Layer w8: MIN1_EndstopChannel3.1@445,800 608.94,800 636.97,771.97 C1_EndstopChannel3.1@685,771.97 752,838.97 752,1361.6 878.4,1488 1072.4,1488 1263.62,1679.23 U3.79@1263.62,1839.65
MISO: EXP0.19 U3.108 U4_ThermocoupleChannel1.7 U4_ThermocoupleChannel2.7 U10.11 | length 3595.5
  Top Layer w8: U3.108@1834.49,1839.65 v1(1959.65,1839.65) 1985,1865 3040,1865 3085,1820 v1(3120,1820) ; U4_ThermocoupleChannel1.7@3665,2469.49 v2(3665,2540) ; v1(3665,2780) U4_ThermocoupleChannel2.7@3665,2854.49
  Bottom Layer w8: v1(1959.65,1839.65) 1959.65,1888.53 1945.4,1902.78 1945.4,1921.42 2190,2166.02 2190,2560.2 2229.8,2600 2280,2600 2298,2618 EXP0.19@2298,2637 ; v1(3120,1820) 3160,1860 3160,1900 3125,1935 3125,2125 3160,2160 3160,2665 ; v2(3665,2540) 3655,2540 3640,2555 3640,2755 v1(3665,2780)
MOD0E1: U3.84 U7_DriverChannelDRV88251.24 | length 972.6
  Top Layer w8: U7_DriverChannelDRV88251.24@1241.02,917.2 1241.02,1291.43 1278.2,1328.61 1278.2,1593.61 1362.05,1677.45 U3.84@1362.05,1839.65
MOD0E2: U3.91 U7_DriverChannelDRV88252.24 | length 1345.3
  Top Layer w8: U3.91@1499.84,1839.65 1499.84,1614.76 1706.6,1408 1992.8,1408 2116.02,1284.78 U7_DriverChannelDRV88252.24@2116.02,917.2
MOD0E3: U3.98 U7_DriverChannelDRV88253.24 | length 2167
  Top Layer w8: U3.98@1637.64,1839.65 1637.64,1615.55 1747.19,1506 2914.8,1506 2991.02,1429.78 U7_DriverChannelDRV88253.24@2991.02,917.2
MOD0E4: U3.113 U7_DriverChannelDRV88254.24 | length 2821.4
  Top Layer w8: U3.113@1905.35,1989.25 1962.76,1989.25 2016.01,1936 3558.6,1936 3866.02,1628.57 U7_DriverChannelDRV88254.24@3866.02,917.2
MOD0E5: U3.120 U7_DriverChannelDRV88255.24 | length 3668.6
  Top Layer w8: U3.120@1905.35,2127.05 1963.56,2127.05 2056.6,2034 4190.6,2034 4741.02,1483.57 U7_DriverChannelDRV88255.24@4741.02,917.2
MOD1E1: U3.83 U7_DriverChannelDRV88251.25 | length 975
  Top Layer w8: U7_DriverChannelDRV88251.25@1215.43,917.2 1215.43,1285.63 1264.2,1334.41 1264.2,1599.41 1342.36,1677.56 U3.83@1342.36,1839.65
MOD1E2: U3.90 U7_DriverChannelDRV88252.25 | length 1342.9
  Top Layer w8: U3.90@1480.16,1839.65 1480.16,1614.64 1700.8,1394 1987.01,1394 2090.43,1290.57 U7_DriverChannelDRV88252.25@2090.43,917.2
MOD1E3: U3.97 U7_DriverChannelDRV88253.25 | length 2164.6
  Top Layer w8: U3.97@1617.95,1839.65 1617.95,1615.44 1741.39,1492 2909.01,1492 2965.43,1435.57 U7_DriverChannelDRV88253.25@2965.43,917.2
MOD1E4: U7_DriverChannelDRV88254.25 | length 2733.8
  Top Layer w8: 1962.65,1969.57 2010.21,1922 3552.8,1922 3840.43,1634.37 U7_DriverChannelDRV88254.25@3840.43,917.2
MOD1E5: U3.119 U7_DriverChannelDRV88255.25 | length 3640.4
  Top Layer w8: U3.119@1905.35,2107.36 1907.99,2110 1960.8,2110 2050.8,2020 4184.8,2020 4715.43,1489.37 U7_DriverChannelDRV88255.25@4715.43,917.2
MOD2E1: U3.82 U7_DriverChannelDRV88251.26 | length 977.5
  Top Layer w8: U7_DriverChannelDRV88251.26@1189.84,917.2 1189.84,1210.16 1190,1210.31 1190,1280 1250.2,1340.2 1250.2,1605.2 1322.68,1677.68 U3.82@1322.68,1839.65
MOD2E2: U3.89 U7_DriverChannelDRV88252.26 | length 1340.4
  Top Layer w8: U3.89@1460.47,1839.65 1460.47,1614.53 1695,1380 1981.21,1380 2064.84,1296.36 U7_DriverChannelDRV88252.26@2064.84,917.2
MOD2E3: U3.96 U7_DriverChannelDRV88253.26 | length 2162.1
  Top Layer w8: U3.96@1598.27,1839.65 1598.27,1615.32 1735.59,1478 2903.21,1478 2939.84,1441.36 U7_DriverChannelDRV88253.26@2939.84,917.2
MOD2E4: U7_DriverChannelDRV88254.26 | length 2703.6
  Top Layer w8: 1962.53,1949.88 2004.41,1908 3547,1908 3811,1644 3811,921.05 U7_DriverChannelDRV88254.26@3814.84,917.2
MOD2E5: U3.118 U7_DriverChannelDRV88255.26 | length 3607.9
  Top Layer w8: U3.118@1905.35,2087.68 1963.33,2087.68 2045.01,2006 4179,2006 4689.84,1495.16 U7_DriverChannelDRV88255.26@4689.84,917.2
MODE0_EXP1: EXP1.1
MODE0_EXP2: EXP1.20
MODE1_EXP1: EXP1.2
MODE1_EXP2: EXP1.19
MODE2_EXP1: EXP1.3
MODE2_EXP2: EXP1.18
MOSI: EXP0.20 U3.109 U10.12 | length 2985.7
  Top Layer w8: U3.109@1905.35,1910.51 1935.87,1880 3065,1880 v1(3095,1850)
  Bottom Layer w8: v1(1935,1880) 1931.4,1883.6 1931.4,1946.4 2175,2190 2175,2565 2247,2637 EXP0.20@2248,2637 ; v1(3095,1850) 3130.2,1850 3146,1865.8 3146,1894.2 3111,1929.2 3111,2130.8 3146,2165.8 3146,2660
NetC4_1: C4.1 C52.1 FB3.1 L2.2 R12.2 R37.2 U2.14 | length 554.1
  Top Layer w10: v1(4927.18,1768.45) 4927.18,1792.33 4937.34,1802.49 U2.14@4937.34,1817.38 ; R37.2@5056.71,2010.45 v1(5093.18,2010.45) ; R12.2@5108.71,1931.45 v1(5145.18,1931.45)
  Bottom Layer w10: v1(4927.18,1768.45) v1(5020.18,1768.45) ; v1(5093.18,2010.45) 5114.18,2010.45 5145.18,1979.45 v1(5145.18,1931.45) 5145.18,1764.45 v1(5106.18,1725.45)
NetC22_1: C22.1 F4.1 U2.10 U2.11 U2.12 U2.13
NetC24_2: C24.2 U2.9
NetC43_2: C43.2 U3.36 X2.1 | length 416.3
  Top Layer w8: X2.1@965,2965 965,2830 1015,2780 1095,2780 1145.51,2729.49 U3.36@1145.51,2670.35
NetC44_2: C44.2 U3.35 X2.2 | length 315.6
  Top Layer w8: X2.2@1114.61,2965 1117.56,2962.05 C44.2@1117.56,2855 1117.56,2797.44 1165.2,2749.8 U3.35@1165.2,2670.35
NetC56_2: C56.2 U6.12 U6.14 | length 132.4
  Top Layer w22: C56.2@645,3147.44 U6.14@645,3279.88
NetC58_2: C58.2 U6.1 USB.1 | length 533
  Top Layer w10: U6.1@745,3640.12 752.56,3647.68 C58.2@752.56,3725 750,3727.56 v2(750,3800)
  Bottom Layer w10: USB.1@545,4084 750,3879 v2(750,3800)
NetC59_2: C59.2 U6.3 U6.4 U6.5 | length 238
  Top Layer w20: U6.5@545,3640.12 U6.4@595,3640.12 U6.3@645,3640.12 645,3720 637.44,3727.56 C59.2@637.44,3775
NetC66_DriverChannelDRV88251_2: C66_DriverChannelDRV88251.2 R30_DriverChannelDRV88251.2 U7_DriverChannelDRV88251.3 | length 216.1
  Top Layer w8: R30_DriverChannelDRV88251.2@1035,584.53 1109.53,584.53 1189.84,664.84 U7_DriverChannelDRV88251.3@1189.84,692.8
NetC66_DriverChannelDRV88252_2: C66_DriverChannelDRV88252.2 R30_DriverChannelDRV88252.2 U7_DriverChannelDRV88252.3 | length 216.1
  Top Layer w8: R30_DriverChannelDRV88252.2@1910,584.53 1984.53,584.53 2064.84,664.84 U7_DriverChannelDRV88252.3@2064.84,692.8
NetC66_DriverChannelDRV88253_2: C66_DriverChannelDRV88253.2 R30_DriverChannelDRV88253.2 U7_DriverChannelDRV88253.3 | length 216.1
  Top Layer w8: R30_DriverChannelDRV88253.2@2785,584.53 2859.53,584.53 2939.84,664.84 U7_DriverChannelDRV88253.3@2939.84,692.8
NetC66_DriverChannelDRV88254_2: C66_DriverChannelDRV88254.2 R30_DriverChannelDRV88254.2 U7_DriverChannelDRV88254.3 | length 216.1
  Top Layer w8: R30_DriverChannelDRV88254.2@3660,584.53 3734.53,584.53 3814.84,664.84 U7_DriverChannelDRV88254.3@3814.84,692.8
NetC66_DriverChannelDRV88255_2: C66_DriverChannelDRV88255.2 R30_DriverChannelDRV88255.2 U7_DriverChannelDRV88255.3 | length 216.1
  Top Layer w8: R30_DriverChannelDRV88255.2@4535,584.53 4609.53,584.53 4689.84,664.84 U7_DriverChannelDRV88255.3@4689.84,692.8
NetC68_DriverChannelDRV88251_1: C68_DriverChannelDRV88251.1 U7_DriverChannelDRV88251.1 | length 256.6
  Top Layer w8: C68_DriverChannelDRV88251.1@975,582.56 965,592.56 965,605 985,625 1105,625 1138.66,658.66 U7_DriverChannelDRV88251.1@1138.66,692.8
NetC68_DriverChannelDRV88251_2: C68_DriverChannelDRV88251.2 U7_DriverChannelDRV88251.2 | length 302.3
  Top Layer w8: C68_DriverChannelDRV88251.2@975,527.44 995,547.44 995,595 1011,611 1111,611 1164.25,664.25 U7_DriverChannelDRV88251.2@1164.25,692.8
NetC68_DriverChannelDRV88252_1: C68_DriverChannelDRV88252.1 U7_DriverChannelDRV88252.1 | length 256.6
  Top Layer w8: C68_DriverChannelDRV88252.1@1850,582.56 1840,592.56 1840,605 1860,625 1980,625 2013.66,658.66 U7_DriverChannelDRV88252.1@2013.66,692.8
NetC68_DriverChannelDRV88252_2: C68_DriverChannelDRV88252.2 U7_DriverChannelDRV88252.2 | length 302.3
  Top Layer w8: C68_DriverChannelDRV88252.2@1850,527.44 1870,547.44 1870,595 1886,611 1986,611 2039.25,664.25 U7_DriverChannelDRV88252.2@2039.25,692.8
NetC68_DriverChannelDRV88253_1: C68_DriverChannelDRV88253.1 U7_DriverChannelDRV88253.1 | length 256.6
  Top Layer w8: C68_DriverChannelDRV88253.1@2725,582.56 2715,592.56 2715,605 2735,625 2855,625 2888.66,658.66 U7_DriverChannelDRV88253.1@2888.66,692.8
NetC68_DriverChannelDRV88253_2: C68_DriverChannelDRV88253.2 U7_DriverChannelDRV88253.2 | length 302.3
  Top Layer w8: C68_DriverChannelDRV88253.2@2725,527.44 2745,547.44 2745,595 2761,611 2861,611 2914.25,664.25 U7_DriverChannelDRV88253.2@2914.25,692.8
NetC68_DriverChannelDRV88254_1: C68_DriverChannelDRV88254.1 U7_DriverChannelDRV88254.1 | length 256.6
  Top Layer w8: C68_DriverChannelDRV88254.1@3600,582.56 3590,592.56 3590,605 3610,625 3730,625 3763.66,658.66 U7_DriverChannelDRV88254.1@3763.66,692.8
NetC68_DriverChannelDRV88254_2: C68_DriverChannelDRV88254.2 U7_DriverChannelDRV88254.2 | length 302.3
  Top Layer w8: C68_DriverChannelDRV88254.2@3600,527.44 3620,547.44 3620,595 3636,611 3736,611 3789.25,664.25 U7_DriverChannelDRV88254.2@3789.25,692.8
NetC68_DriverChannelDRV88255_1: C68_DriverChannelDRV88255.1 U7_DriverChannelDRV88255.1 | length 256.6
  Top Layer w8: C68_DriverChannelDRV88255.1@4475,582.56 4465,592.56 4465,605 4485,625 4605,625 4638.66,658.66 U7_DriverChannelDRV88255.1@4638.66,692.8
NetC68_DriverChannelDRV88255_2: C68_DriverChannelDRV88255.2 U7_DriverChannelDRV88255.2 | length 302.3
  Top Layer w8: C68_DriverChannelDRV88255.2@4475,527.44 4495,547.44 4495,595 4511,611 4611,611 4664.25,664.25 U7_DriverChannelDRV88255.2@4664.25,692.8
NetC71_DriverChannelDRV88251_2: C71_DriverChannelDRV88251.2 U7_DriverChannelDRV88251.15 | length 94.4
  Top Layer w8: C71_DriverChannelDRV88251.2@1467.44,1010 1471.34,1006.1 U7_DriverChannelDRV88251.15@1471.34,917.2
NetC71_DriverChannelDRV88252_2: C71_DriverChannelDRV88252.2 U7_DriverChannelDRV88252.15 | length 94.4
  Top Layer w8: C71_DriverChannelDRV88252.2@2342.44,1010 2346.34,1006.1 U7_DriverChannelDRV88252.15@2346.34,917.2
NetC71_DriverChannelDRV88253_2: C71_DriverChannelDRV88253.2 U7_DriverChannelDRV88253.15 | length 94.4
  Top Layer w8: C71_DriverChannelDRV88253.2@3217.44,1010 3221.34,1006.1 U7_DriverChannelDRV88253.15@3221.34,917.2
NetC71_DriverChannelDRV88254_2: C71_DriverChannelDRV88254.2 U7_DriverChannelDRV88254.15 | length 94.4
  Top Layer w8: C71_DriverChannelDRV88254.2@4092.44,1010 4096.34,1006.1 U7_DriverChannelDRV88254.15@4096.34,917.2
NetC71_DriverChannelDRV88255_2: C71_DriverChannelDRV88255.2 U7_DriverChannelDRV88255.15 | length 94.4
  Top Layer w8: C71_DriverChannelDRV88255.2@4967.44,1010 4971.34,1006.1 U7_DriverChannelDRV88255.15@4971.34,917.2
NetC73_2: C73.2 R23.2 U3.40 | length 558.9
  Top Layer w10: C73.2@602.56,2680 602.56,2630.75 739.25,2630.75 830,2540 U3.40@1074.65,2540
NetC75_DriverChannelDRV88251_2: C75_DriverChannelDRV88251.2 R31_DriverChannelDRV88251.1 U7_DriverChannelDRV88251.12 U7_DriverChannelDRV88251.13 | length 226.9
  Top Layer w8: U7_DriverChannelDRV88251.12@1420.16,692.8 U7_DriverChannelDRV88251.13@1445.75,692.8 1445.75,659.25 1470,635 1517.56,635 1538.03,614.53 R31_DriverChannelDRV88251.1@1595,614.53
NetC75_DriverChannelDRV88252_2: C75_DriverChannelDRV88252.2 R31_DriverChannelDRV88252.1 U7_DriverChannelDRV88252.12 U7_DriverChannelDRV88252.13 | length 226.9
  Top Layer w8: U7_DriverChannelDRV88252.12@2295.16,692.8 U7_DriverChannelDRV88252.13@2320.75,692.8 2320.75,659.25 2345,635 2392.56,635 2413.03,614.53 R31_DriverChannelDRV88252.1@2470,614.53
NetC75_DriverChannelDRV88253_2: C75_DriverChannelDRV88253.2 R31_DriverChannelDRV88253.1 U7_DriverChannelDRV88253.12 U7_DriverChannelDRV88253.13 | length 226.9
  Top Layer w8: U7_DriverChannelDRV88253.12@3170.16,692.8 U7_DriverChannelDRV88253.13@3195.75,692.8 3195.75,659.25 3220,635 3267.56,635 3288.03,614.53 R31_DriverChannelDRV88253.1@3345,614.53
NetC75_DriverChannelDRV88254_2: C75_DriverChannelDRV88254.2 R31_DriverChannelDRV88254.1 U7_DriverChannelDRV88254.12 U7_DriverChannelDRV88254.13 | length 226.9
  Top Layer w8: U7_DriverChannelDRV88254.12@4045.16,692.8 U7_DriverChannelDRV88254.13@4070.75,692.8 4070.75,659.25 4095,635 4142.56,635 4163.03,614.53 R31_DriverChannelDRV88254.1@4220,614.53
NetC75_DriverChannelDRV88255_2: C75_DriverChannelDRV88255.2 R31_DriverChannelDRV88255.1 U7_DriverChannelDRV88255.12 U7_DriverChannelDRV88255.13 | length 226.9
  Top Layer w8: U7_DriverChannelDRV88255.12@4920.16,692.8 U7_DriverChannelDRV88255.13@4945.75,692.8 4945.75,659.25 4970,635 5017.56,635 5038.03,614.53 R31_DriverChannelDRV88255.1@5095,614.53
NetD7_2: D7.2 R8.1 | length 58.5
  Top Layer w15: R8.1@5354,2266.54 D7.2@5354,2325
NetD9_2: D9.2 R11.1 | length 70.5
  Top Layer w10: D9.2@5286.41,2013.94 5286.49,2013.87 R11.1@5286.49,1943.45
NetD10_1: D10.1 FAN-1.2 Q2.3 R14.2 | length 235.7
  Top Layer w15: Q2.3@3100,3915 3100,3842.15 3140.04,3802.1 R14.2@3145,3802.1 3213.5,3733.6 D10.1@3213.5,3729.19
NetD10_2: D10.2 R13.2 | length 54.1
  Top Layer w15: D10.2@3213.5,3815.8 3215,3817.3 R13.2@3215,3869.27
NetD11_1: D11.1 FAN-2.2 Q3.3 | length 280.8
  Top Layer w10: Q3.3@2765,3938.01 2765,3800.05 2787.73,3777.32 2830.37,3777.32 D11.1@2878.5,3729.19
NetD11_2: D11.2 R47.2 R48.2 | length 128.3
  Top Layer w10: R48.2@2810,3802.1 2864.8,3802.1 D11.2@2878.5,3815.8 2878.5,3867.77 R47.2@2880,3869.27
NetD12_1: D12.1 D13.1 FETS.2 Q4.5 R57.2
NetD13_2: D13.2 R56.1 | length 54.1
  Top Layer w8: D13.2@1003.5,3611.87 D13.2@1005,3613.36
  Top Layer w15: D13.2@1005,3613.36 R56.1@1005,3665.33
NetD14_1: D14.1 D15.1 FETS.4 Q5.5 R61.2
NetD14_2: D14.2 R60.1 | length 52
  Top Layer w15: D14.2@1405,3613.36 R60.1@1405,3665.33
NetD16_1: D16.1 D17.1 FETS.6 Q6.5 R65.2
NetD16_2: D16.2 R64.1
NetD18_1: D18.1 D19.1 FETS.8 Q7.5 R69.2
NetD18_2: D18.2 R68.1
NetF1_1: "Power Input1.3" F1.1
NetF2_1: "Power Input1.1" F2.1
NetF3_1: "Power Input1.5" F3.1
NetF4_2: "Logic Source1.2" F4.2 | length 176.4
  Top Layer w40: 4480,2020 4480,1984.94 F4.2@4579.94,1885
NetL2_1: L2.1 U2.1 U2.2 U2.3
NetM1_DriverChannelDRV88251_1: M1_DriverChannelDRV88251.1 U7_DriverChannelDRV88251.5 | length 563.4
  Top Layer w14: 1205,575 1241.02,611.02 U7_DriverChannelDRV88251.5@1241.02,692.8
  Top Layer w40: M1_DriverChannelDRV88251.1@1155,165 1155,265 1205,315 1205,575
NetM1_DriverChannelDRV88251_2: M1_DriverChannelDRV88251.2 U7_DriverChannelDRV88251.7 | length 543.2
  Top Layer w14: 1255,535 1292.2,572.2 U7_DriverChannelDRV88251.7@1292.2,692.8
  Top Layer w40: M1_DriverChannelDRV88251.2@1255,165 1255,535
NetM1_DriverChannelDRV88251_3: M1_DriverChannelDRV88251.3 U7_DriverChannelDRV88251.8 | length 543.2
  Top Layer w14: U7_DriverChannelDRV88251.8@1317.8,692.8 1317.8,572.2 1355,535
  Top Layer w40: M1_DriverChannelDRV88251.3@1355,165 1355,535
NetM1_DriverChannelDRV88251_4: M1_DriverChannelDRV88251.4 U7_DriverChannelDRV88251.10 | length 563.4
  Top Layer w14: U7_DriverChannelDRV88251.10@1368.98,692.8 1368.98,615 1405,578.98
  Top Layer w40: 1405,578.98 1405,315 1455,265 M1_DriverChannelDRV88251.4@1455,165
NetM1_DriverChannelDRV88252_1: M1_DriverChannelDRV88252.1 U7_DriverChannelDRV88252.5 | length 563.4
  Top Layer w14: 2080,575 2116.02,611.02 U7_DriverChannelDRV88252.5@2116.02,692.8
  Top Layer w40: M1_DriverChannelDRV88252.1@2030,165 2030,265 2080,315 2080,575
NetM1_DriverChannelDRV88252_2: M1_DriverChannelDRV88252.2 U7_DriverChannelDRV88252.7 | length 543.2
  Top Layer w14: 2130,535 2167.2,572.2 U7_DriverChannelDRV88252.7@2167.2,692.8
  Top Layer w40: M1_DriverChannelDRV88252.2@2130,165 2130,535
NetM1_DriverChannelDRV88252_3: M1_DriverChannelDRV88252.3 U7_DriverChannelDRV88252.8 | length 543.2
  Top Layer w14: U7_DriverChannelDRV88252.8@2192.8,692.8 2192.8,572.2 2230,535
  Top Layer w40: M1_DriverChannelDRV88252.3@2230,165 2230,535
NetM1_DriverChannelDRV88252_4: M1_DriverChannelDRV88252.4 U7_DriverChannelDRV88252.10 | length 563.4
  Top Layer w14: U7_DriverChannelDRV88252.10@2243.98,692.8 2243.98,615 2280,578.98
  Top Layer w40: 2280,578.98 2280,315 2330,265 M1_DriverChannelDRV88252.4@2330,165
NetM1_DriverChannelDRV88253_1: M1_DriverChannelDRV88253.1 U7_DriverChannelDRV88253.5 | length 563.4
  Top Layer w14: 2955,575 2991.02,611.02 U7_DriverChannelDRV88253.5@2991.02,692.8
  Top Layer w40: M1_DriverChannelDRV88253.1@2905,165 2905,265 2955,315 2955,575
NetM1_DriverChannelDRV88253_2: M1_DriverChannelDRV88253.2 U7_DriverChannelDRV88253.7 | length 543.2
  Top Layer w14: 3005,535 3042.2,572.2 U7_DriverChannelDRV88253.7@3042.2,692.8
  Top Layer w40: M1_DriverChannelDRV88253.2@3005,165 3005,535
NetM1_DriverChannelDRV88253_3: M1_DriverChannelDRV88253.3 U7_DriverChannelDRV88253.8 | length 543.2
  Top Layer w14: U7_DriverChannelDRV88253.8@3067.8,692.8 3067.8,572.2 3105,535
  Top Layer w40: M1_DriverChannelDRV88253.3@3105,165 3105,535
NetM1_DriverChannelDRV88253_4: M1_DriverChannelDRV88253.4 U7_DriverChannelDRV88253.10 | length 563.4
  Top Layer w14: U7_DriverChannelDRV88253.10@3118.98,692.8 3118.98,615 3155,578.98
  Top Layer w40: 3155,578.98 3155,315 3205,265 M1_DriverChannelDRV88253.4@3205,165
NetM1_DriverChannelDRV88254_1: M1_DriverChannelDRV88254.1 U7_DriverChannelDRV88254.5 | length 563.4
  Top Layer w14: 3830,575 3866.02,611.02 U7_DriverChannelDRV88254.5@3866.02,692.8
  Top Layer w40: M1_DriverChannelDRV88254.1@3780,165 3780,265 3830,315 3830,575
NetM1_DriverChannelDRV88254_2: M1_DriverChannelDRV88254.2 U7_DriverChannelDRV88254.7 | length 543.2
  Top Layer w14: 3880,535 3917.2,572.2 U7_DriverChannelDRV88254.7@3917.2,692.8
  Top Layer w40: M1_DriverChannelDRV88254.2@3880,165 3880,535
NetM1_DriverChannelDRV88254_3: M1_DriverChannelDRV88254.3 U7_DriverChannelDRV88254.8 | length 543.2
  Top Layer w14: U7_DriverChannelDRV88254.8@3942.8,692.8 3942.8,572.2 3980,535
  Top Layer w40: M1_DriverChannelDRV88254.3@3980,165 3980,535
NetM1_DriverChannelDRV88254_4: M1_DriverChannelDRV88254.4 U7_DriverChannelDRV88254.10 | length 563.4
  Top Layer w14: U7_DriverChannelDRV88254.10@3993.98,692.8 3993.98,615 4030,578.98
  Top Layer w40: 4030,578.98 4030,315 4080,265 M1_DriverChannelDRV88254.4@4080,165
NetM1_DriverChannelDRV88255_1: M1_DriverChannelDRV88255.1 U7_DriverChannelDRV88255.5 | length 563.4
  Top Layer w14: 4705,575 4741.02,611.02 U7_DriverChannelDRV88255.5@4741.02,692.8
  Top Layer w40: M1_DriverChannelDRV88255.1@4655,165 4655,265 4705,315 4705,575
NetM1_DriverChannelDRV88255_2: M1_DriverChannelDRV88255.2 U7_DriverChannelDRV88255.7 | length 543.2
  Top Layer w14: 4755,535 4792.2,572.2 U7_DriverChannelDRV88255.7@4792.2,692.8
  Top Layer w40: M1_DriverChannelDRV88255.2@4755,165 4755,535
NetM1_DriverChannelDRV88255_3: M1_DriverChannelDRV88255.3 U7_DriverChannelDRV88255.8 | length 543.2
  Top Layer w14: U7_DriverChannelDRV88255.8@4817.8,692.8 4817.8,572.2 4855,535
  Top Layer w40: M1_DriverChannelDRV88255.3@4855,165 4855,535
NetM1_DriverChannelDRV88255_4: M1_DriverChannelDRV88255.4 U7_DriverChannelDRV88255.10 | length 563.4
  Top Layer w14: U7_DriverChannelDRV88255.10@4868.98,692.8 4868.98,615 4905,578.98
  Top Layer w40: 4905,578.98 4905,315 4955,265 M1_DriverChannelDRV88255.4@4955,165
NetP2_ThermistorChannel1_1: P2_ThermistorChannel1.1 R13_ThermistorChannel1.1 R14_ThermistorChannel1.2 | length 216.7
  Top Layer w10: R13_ThermistorChannel1.1@4374.53,2400 R14_ThermistorChannel1.2@4374.53,2335 4430,2335 4445,2320 P2_ThermistorChannel1.1@4520,2320
NetP2_ThermistorChannel2_1: P2_ThermistorChannel2.1 R13_ThermistorChannel2.1 R14_ThermistorChannel2.2 | length 216.7
  Top Layer w10: R13_ThermistorChannel2.1@4374.53,2785 R14_ThermistorChannel2.2@4374.53,2720 4430,2720 4445,2705 P2_ThermistorChannel2.1@4520,2705
NetQ2_1: Q2.1 R45.2 | length 57.4
  Top Layer w20: R45.2@3062.6,3809.7 Q2.1@3062.6,3867.14
NetQ3_1: Q3.1 R52.2 | length 62.4
  Top Layer w20: R52.2@2727.6,3804.7 Q3.1@2727.6,3867.14
NetQ4_4: Q4.4 R58.2 | length 50.5
  Top Layer w10: Q4.4@1286.5,3529.66 1291.36,3534.53 R58.2@1335,3534.53
NetQ5_4: Q5.4 R62.2 | length 68.6
  Top Layer w10: Q5.4@1686,3529.28 1721.25,3564.53 R62.2@1740,3564.53
NetQ6_4: Q6.4 R66.2 | length 68.6
  Top Layer w10: Q6.4@2086,3529.28 2104.75,3529.28 R66.2@2140,3564.53
NetQ7_4: Q7.4 R70.2 | length 68.6
  Top Layer w10: Q7.4@2486,3529.28 2504.75,3529.28 R70.2@2540,3564.53
NetR4_1: R4.1 U3.51 | length 383.6
  Top Layer w10: R4.1@700,2345.47 804.53,2345.47 826.1,2323.9 U3.51@1074.65,2323.9
NetR5_2: R5.2 U3.42 | length 403.1
  Top Layer w10: R5.2@915,2670 1080,2670 1135,2615 1135,2525 1111.06,2501.06 U3.42@1074.65,2501.06
NetR6_1: R6.1 U3.53 | length 451.8
  Top Layer w10: R6.1@650,2220.47 650,2221.46 677.73,2249.19 804.19,2249.19 839.53,2284.53 U3.53@1074.65,2284.53